# Altium PCB main_pcb.PcbDoc (part 2 of 2)
Units mil, origin at the board's own origin, x right, y up, seen from the top; angles counter-clockwise.
Board outline 4412.04 x 5197.88 mil, 4 copper layers (Top Layer, Mid-Layer Top, Mid-Layer Bottom, Bottom Layer); 125 components, 93 nets, 440 pads, 146 vias.
Unrouted connection lines stored in the file: 4.
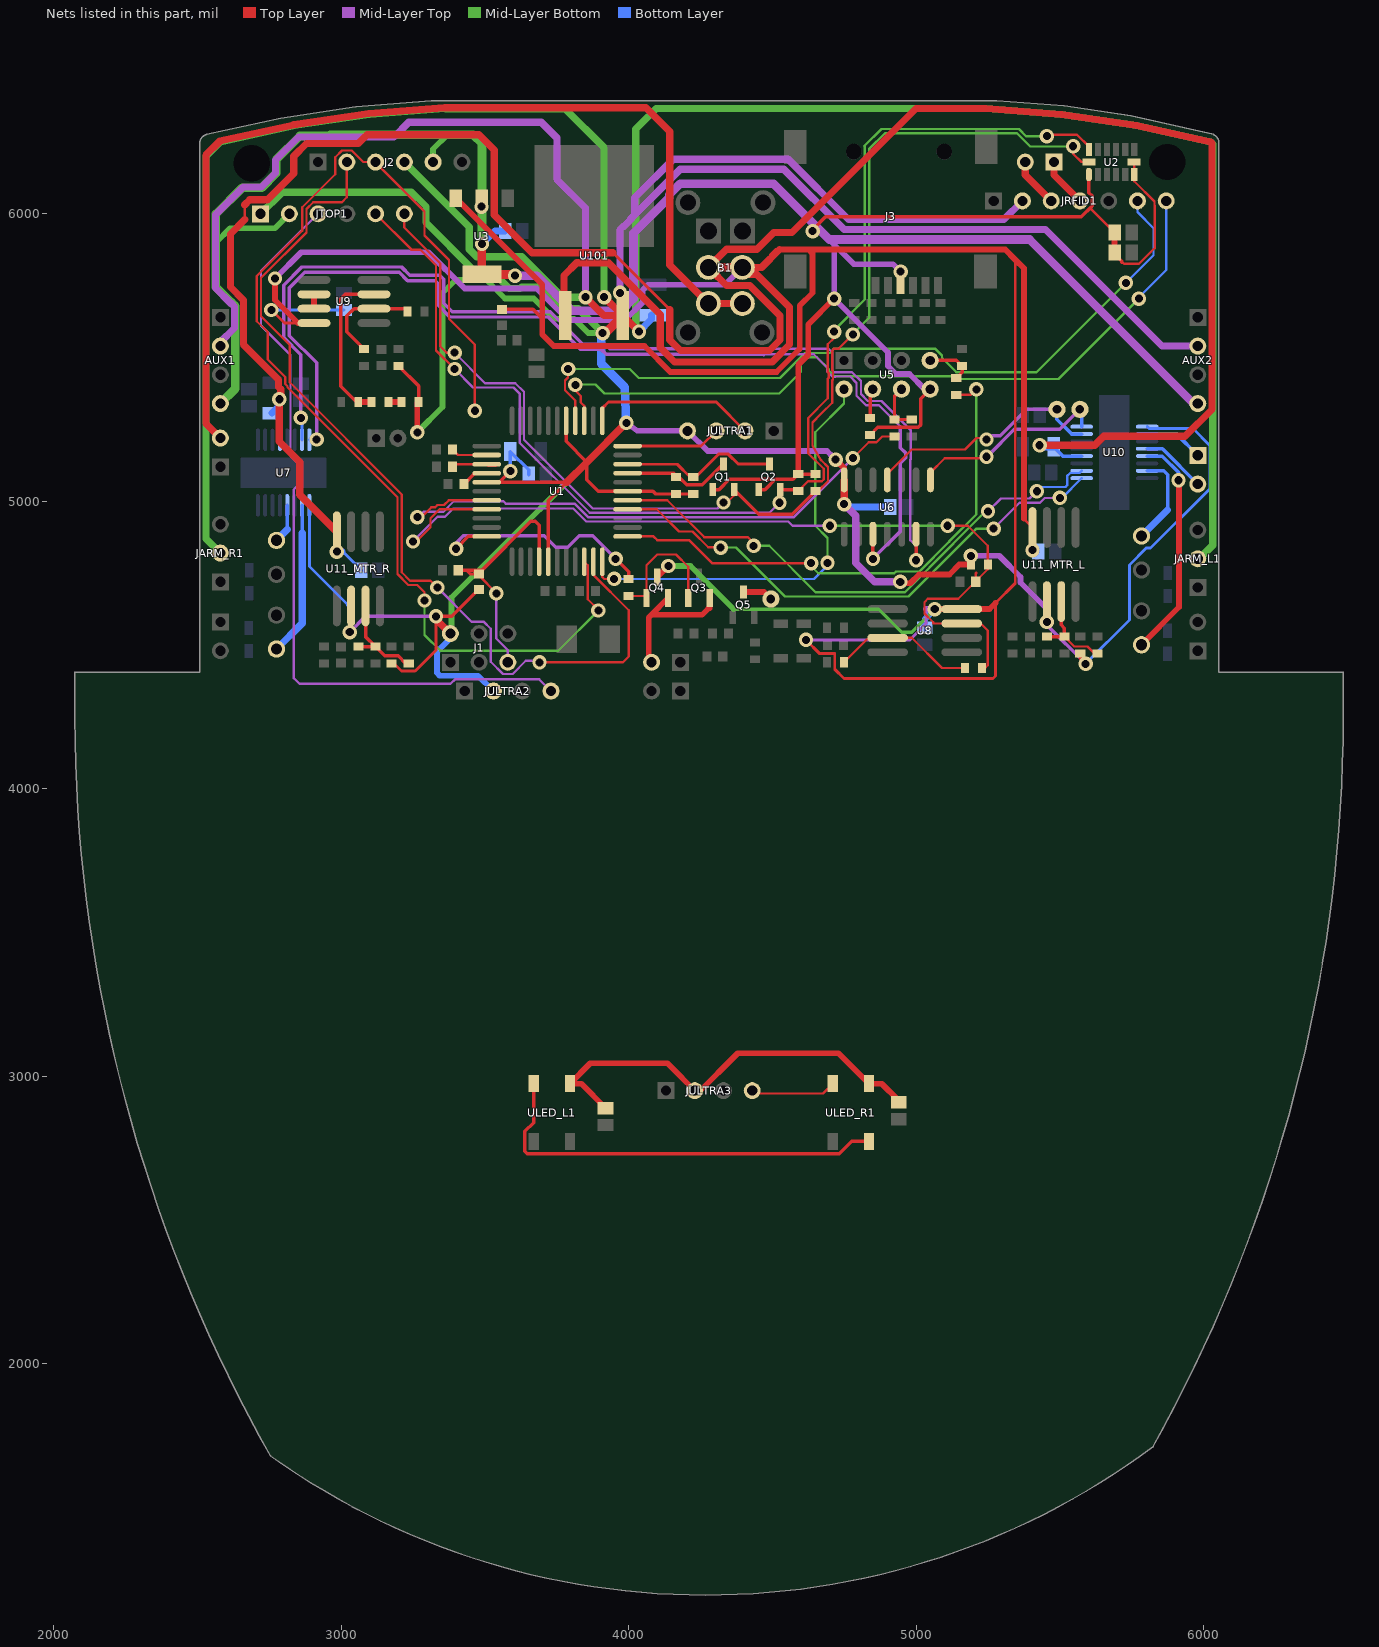
[diagram p4: the nets of this part, all layers, seen from the top]

## Via types
v1: diameter 50, hole 28, Top Layer to Bottom Layer, 138 vias
v2: diameter 25.98, hole 12.99, Top Layer to Bottom Layer, tented top, 8 vias

## Nets (pads, with @x,y where several pads share a name; then routed paths per layer and width w, separated by ;. In a path a pad name is that pad's centre, name@x,y a point inside that pad or via, vN(x,y) a via of type N, cw(c..) or ccw(c..) an arc to the next point about the centre after c; other vN are vias at no path point) (continued)
NetJANTENNA_2: JANTENNA.2 Q3.E Q4.E | length 512
  Top Layer w20: JANTENNA.2@4080,4440 4080,4450 4070,4460 4070,4596.18 4076.91,4603.09 4078.82,4605 ; Q4.E@4137.4,4663.58 4078.82,4605 ; 4157.4,4605 4160,4605 ; Q3.E@4282.4,4663.58 4282.4,4627.6 ; 4078.82,4605 4160,4605 ; 4160,4605 4255,4605 4277.6,4627.6 ; 4277.6,4627.6 4282.4,4627.6 ; 4277.6,4627.6 4282.4,4627.6
NetJANTENNA_MOD_1: JANTENNA_MOD.1 JRFID1.4 | length 172.3
  Top Layer w25: JANTENNA_MOD.1@5480,6180 5480,6135 JRFID1.4@5570,6045
NetJANTENNA_MOD_2: JANTENNA_MOD.2 JRFID1.3 | length 172.3
  Top Layer w25: JANTENNA_MOD.2@5380,6180 5380,6135 JRFID1.3@5470,6045
NetJSPK1_1: JSPK1.1 U10.2 | length 206.5
  Bottom Layer w12: U10.2@5804.17,5233.98 5906.02,5233.98 JSPK1.1@5980,5160
NetJSPK1_2: JSPK1.2 U10.4 | length 226.7
  Bottom Layer w12: U10.4@5804.17,5182.8 5857.2,5182.8 JSPK1.2@5980,5060
NetL1_MTR_L_1: L1_MTR_L.1 U10.7 | length 327.3
  Bottom Layer w12: U10.7@5804.17,5106.02 5861.02,5106.02 5875,5092.05 5875,4969.99
  Bottom Layer w25: L1_MTR_L.1@5784.06,4879.06 5875,4969.99
NetL1_MTR_R_1: L1_MTR_R.1 U7.2 | length 537.6
  Bottom Layer w12: U7.2@2863.98,4985.83 2865,4984.8 2865,4890
  Bottom Layer w25: L1_MTR_R.1@2775,4485.94 2865,4575.94 2865,4890
NetL2_MTR_L_2: L2_MTR_L.2 U10.5 | length 798
  Top Layer w20: L2_MTR_L.2@5784.06,4500.94 5915,4631.88 5915,5071.26 v1(5913,5073.26) v1@5905,5081.26
  Bottom Layer w12: U10.5@5804.17,5157.2 5855.93,5157.2 5913,5100.13 v1(5913,5073.26)
NetL2_MTR_R_2: L2_MTR_R.2 U7.4 | length 137.4
  Bottom Layer w12: 2812.8,4901.85 U7.4@2812.8,4985.83
  Bottom Layer w25: L2_MTR_R.2@2775,4864.06 2812.8,4901.85
NetQ3_B: Q3.B Q4.B R22.1 | length 480.3
  Top Layer w8: R22.1@4000,4670.47 Q4.B@4069.49,4670.47 ; Q4.B@4069.53,4670.51 Q4.B@4069.49,4670.47 ; Q3.B@4207.6,4663.58 4207.6,4772.4 4165,4815 4100,4815 4062.6,4777.6 Q4.B@4062.6,4663.58 Q4.B@4069.49,4670.47
NetR1_1: R1.1 U1.37 | length 94.8
  Top Layer w12: R1.1@3427.56,5060 3465.56,5098 U1.37@3506.6,5098
NetR2_1: R2.1 U1.36 | length 156.1
  Top Layer w8: R2.1@3387.56,5120 3396.56,5129 U1.36@3506.6,5129 3512.65,5122.95 U1.36@3537.42,5122.95
NetR3_1: R3.1 U1.35 | length 164.8
  Top Layer w8: R3.1@3387.56,5180 3406.56,5161 U1.35@3506.6,5161 U1.35@3544.47,5161
NetR17_1: R17.1 R19.1 U5.RXD | length 168.2
  Top Layer w12: U5.RXD@5049.12,5490.06 5140.41,5490.06 R19.1@5160,5470.47 5160,5449.53 R17.1@5140,5429.53
NetR18_2: R18.2 U5.CH_PD | length 119.7
  Top Layer w12: R18.2@4840,5289.53 4840,5380.94 U5.CH_PD@4849.12,5390.06 U5.CH_PD@4860,5379.18
NetR20_1: R20.1 R21.1 U5.RST | length 175.5
  Top Layer w12: U5.RST@4949.12,5390.06 4925,5365.95 R20.1@4925,5284.53 R21.1@4985,5284.53
NetR25_1: R25.1 R26.1 U8.3 | length 499.2
  Top Layer w8: R26.1@4749.53,4440 4829.53,4520 4896.06,4520 U8.3@4901.06,4525 4985,4525 5090,4420 R25.1@5170,4420
NetR28_1: R28.1 R30.2 U9.2 | length 365.3
  Top Layer w12: R30.2@3080,5529.53 3020,5589.53 3020,5645 3045,5670 U9.2@3114.33,5670 3220.47,5670 R28.1@3230.47,5660
NetR31_2: R31.2 R32.1 U9.3 | length 555.8
  Top Layer w12: R31.2@3059.53,5345 3054,5345 2999,5400 2999,5705 3014,5720 U9.3@3114.33,5720
  Top Layer w20: R31.2@3059.53,5345 R32.1@3105.47,5345
NetR32_2: R32.2 R33.1 | length 45.9
  Top Layer w20: R32.2@3164.53,5345 R33.1@3210.47,5345
NetR35_MTR_L_2: R35_MTR_L.2 R36_MTR_L.2 R99_MTR_L.1 U11_MTR_L.3 | length 325.5
  Top Layer w8: R36_MTR_L.2@5515.94,4529.53 5550.22,4495.25 5596.04,4495.25 R99_MTR_L.1@5620.82,4470.47
  Top Layer w12: R35_MTR_L.2@5455.94,4529.53 R36_MTR_L.2@5515.94,4529.53 5515.94,4559.06 5505,4570 U11_MTR_L.3@5505,4651.06 ; R99_MTR_L.1@5620.82,4470.47 R99_MTR_L.1@5630.94,4470.47
NetR35_MTR_R_2: R35_MTR_R.2 R36_MTR_R.2 R99_MTR_R.1 U11_MTR_R.3 | length 355.5
  Top Layer w12: R35_MTR_R.2@3060,4494.53 R36_MTR_R.2@3120,4494.53 ; U11_MTR_R.3@3085,4636.06 3085,4529.53 R36_MTR_R.2@3120,4494.53 ; R99_MTR_R.1@3235,4435.47 3224.88,4435.47 3198.1,4462.25 3152.28,4462.25 R36_MTR_R.2@3120,4494.53
NetU6_3: U6.3 U7.16 | length 3680.5
  Top Layer w12: v1(4850,4800) U6.3@4850,4885.51
  Mid-Layer Top w8: 4468.37,5511.63 4644.29,5511.63 4693.12,5462.79 4693.12,5461.72 4691.46,5460.06 4691.46,5450.95 4710,5432.41 4719.12,5432.41 4720.78,5434.06 4770.94,5434.06 4793.12,5411.88 4793.12,5366.87 4825.92,5334.06 4870.94,5334.06 4945,5260
  Mid-Layer Top w12: v1(2915,5215) 2915,5481.87 2820.31,5576.57 2820.31,5742.08 2874.24,5796.02 3202.37,5796.02 3230.89,5767.5 3327.5,5767.5 3338,5757 3338,5681.39 3378.39,5641 3435,5641 ; 3444,5641 3435,5641 ; 4469.55,5510.45 4468.37,5511.63 3922.11,5511.63 3905.74,5528 3833.35,5528 3720.35,5641 3435,5641 ; v1(4850,4800) 4945,4895 4945,5133.13 4964,5152.13 4964,5167.87 4945,5186.87 4945,5260
  Bottom Layer w10: U7.16@2889.57,5215 U7.16@2889.57,5214.17 U7.16@2889.57,5215 ; U7.16@2889.57,5215 v1(2915,5215) U7.16@2889.57,5215
NetU6_6: U6.6 U7.15 | length 3670.2
  Top Layer w12: v1(5000,4795) U6.6@5000,4885.51
  Mid-Layer Top w8: 4487.15,5530.63 4695.59,5530.63 4708.12,5518.1 4708.12,5455.51 4714.56,5449.06 4777.15,5449.06 4808.12,5418.1 4808.12,5373.08 4832.14,5349.06 4879.98,5349.06 4981,5248.04 4981,5145.09 4980,5144.09 4980,4865 5000,4845 v1(5000,4795)
  Mid-Layer Top w12: v1(2860,5290) 2860,5510 2800,5570 2800,5751.26 2863.76,5815.02 3210.24,5815.02 3238.76,5786.5 3343.5,5786.5 3357,5773 3357,5689.26 3386.26,5660 3728.22,5660 3841.22,5547 3918,5547 3934.37,5530.63 4487.15,5530.63
  Bottom Layer w12: v1(2860,5290) 2863.98,5286.02 U7.15@2863.98,5214.17
NetU6_8: pad.0@5570,5320 U6.8 U10.16 | length 750.5
  Top Layer w8: U6.8@5050,5100 5100,5150 v1@5237,5150 ; v1@5237,5150 v1@5238.5,5148.5 ; v1@5237,5150 v1@5238.5,5148.5 ; v1@5238.5,5148.5 5246,5141 v1@5238.5,5148.5
  Top Layer w12: U6.8@5045,5079.49 U6.8@5050,5074.49 U6.8@5050,5100 ; v1(5245,5155) 5250,5155 v1@5255,5150 ; v1@5252.5,5147.5 5246,5141 v1@5252.5,5147.5 ; v1@5252.5,5147.5 v1@5255,5150 ; v1@5252.5,5147.5 v1@5255,5150
  Mid-Layer Top w12: v1@5251.87,5160 5341.87,5250 5500,5250 pad.0@5570,5320
  Bottom Layer w12: pad.0@5570,5320 5575.83,5314.17 U10.16@5575.83,5259.57
NetU6_11: pad.0@5490,5320 U6.11 U10.15 | length 911.4
  Top Layer w8: U6.11@4900,5095 4985,5180 5170,5180 5210,5220 v1@5235,5220 ; v1@5235,5220 v1@5242.5,5212.5 ; v1@5235,5220 v1@5242.5,5212.5 ; v1@5242.5,5212.5 5245,5210 v1@5242.5,5212.5
  Top Layer w12: U6.11@4900,5074.49 U6.11@4900,5095
  Mid-Layer Top w12: pad.0@5490,5320 5385,5320 5292.5,5227.5 v1@5262.5,5227.5 ; v1@5247.5,5212.5 5245,5210 v1@5247.5,5212.5 ; v1@5247.5,5212.5 v1@5262.5,5227.5 ; v1@5247.5,5212.5 v1@5262.5,5227.5
  Bottom Layer w10: v1@5232,5228 v1(5245,5215)
  Bottom Layer w12: pad.0@5490,5320 5490,5284.79 5540.81,5233.98 U10.15@5575.83,5233.98
NetU9_6: U9.6 U9.7 | length 50
  Top Layer w20: U9.7@2905.67,5670 U9.6@2905.67,5720
NetULED_L1_2: ULED_L1.2 ULED_R1.4 | length 1465.9
  Top Layer w12: ULED_L1.2@3670.08,2974.17 3670.08,2839.01 3639.36,2808.3 3639.36,2738.47 3646.98,2730.86 4733.18,2730.86 4775.71,2773.39 ULED_R1.4@4836.06,2773.39
RESET: C3.2 J1.5 R8.2 U1.4 | length 910.5
  Top Layer w8: R8.2@3480,4747.56 3480,4741.46 3540,4681.46 v1(3540,4680)
  Top Layer w10: C3.2@3407.56,4760 3437,4760 3449.44,4747.56 R8.2@3480,4747.56
  Top Layer w12: C3.2@3407.56,4760 3467.56,4760 3490,4760 3660,4930 3675,4930 3688.6,4916.4 U1.4@3688.6,4790
  Mid-Layer Top w8: v1(3540,4680) 3540,4565 3539.47,4564.47 3539.47,4523.21 3580,4482.69 J1.5@3580,4440
RFID_PULSE: R22.2 U1.44 | length 865.2
  Top Layer w12: v1(3400,4835) 3443,4878 U1.44@3506.6,4878 ; v1(3955,4800) 4000,4755 R22.2@4000,4729.53
  Mid-Layer Top w12: v1(3400,4835) 3400,4855 3425,4880 3706.26,4880 3746.31,4839.95 3788.69,4839.95 3828.74,4880 3875,4880 v1(3955,4800)
RFID_READ: C103.2 R23.2 R25.2 U1.41 U8.7 | length 3318.3
  Top Layer w8: v1(3250,4860) 3260,4860 v1@3260.46,4859.54 ; v1@3260,4859.09 v1@3260.46,4859.54 ; U1.41@3506.6,4972 3342,4972 3311,4941 3311,4910.09 v1@3262.96,4862.04 ; v1@5105,4910 v1(5110,4915) 5180,4915 5249.53,4845.47 R23.2@5249.53,4780 5249.53,4763.94 5146.59,4661 5041,4661 5029,4649 5029,4610.09 5060,4579.09 5060,4575 U8.7@5158.94,4575 ; U8.7@5220,4575 U8.7@5158.94,4575 ; R25.2@5229.53,4420 5239.53,4420 5249.53,4430 5249.53,4550.47 5225,4575 U8.7@5158.94,4575 ; v1@3260.46,4859.54 v1@3262.96,4862.04 ; v1@3260.46,4859.54 3262.96,4857.04 3262.96,4860 v1@3262.96,4862.04 ; C103.2@5206.58,4720.98 5207.56,4721.97 C103.2@5206.58,4720.98
  Top Layer w10: C103.2@5207.56,4720 5207.56,4721.97 5207.56,4749 ; 5207.56,4749 5209.53,4750.97 5207.56,4749
  Mid-Layer Top w8: v1(3250,4860) 3250,4860.91 3335.09,4946 3361,4946 3390,4975 3807.57,4975 3852.57,4930 4555,4930 4570,4915 v1(4700,4915)
  Mid-Layer Bottom w8: v1(4700,4915) v1(5110,4915)
RST_WIFI: R20.2 U1.40 | length 2252.4
  Top Layer w8: v1(3265,4945) 3265,4935 3270,4930 v1@3270,4935 ; U1.40@3506.6,5004 3374.91,5004 3357.91,4987 3335.79,4987 3327.79,4979 3314,4979 ; v1@4790,5160 4835.69,5205.69 4862.27,5205.69 4882.05,5225.47 R20.2@4925,5225.47 ; v1@3270,4935 v1@3272.5,4937.5 ; v1@3270,4935 v1@3272.5,4937.5 ; v1@3272.5,4937.5 3314,4979 ; v1@3272.5,4937.5 3314,4979
  Top Layer w10: v1(4780,5150) v1@4790,5160
  Mid-Layer Top w8: v1(3265,4945) 3265,4935 v1@3275,4925 ; v1@4770,5140 4575,4945 3858.79,4945 3811.83,4991.95 3573.05,4991.95 3565,5000 3392.12,5000 3356.12,4964 3286.96,4964 v1@3275,4952.04 ; v1@3275,4925 v1@3275,4945 ; v1@3275,4925 v1@3275,4945 ; v1@3275,4945 v1@3275,4952.04 ; v1@3275,4945 v1@3275,4952.04
  Mid-Layer Top w10: v1(4780,5150) v1@4780,5140 ; v1@4780,5140 4770,5140 v1@4780,5140
RXD_FTDI: J2.3 U1.9 | length 4086.8
  Top Layer w8: v1(3290,4655) 3290,4684 3265,4709 3233.88,4709 3196,4746.88 3196,5014 2813.5,5396.5 2813.5,5400.29 2806,5407.79 2806,5432.23 2744.53,5493.7 2744.53,5588.45 2706.47,5626.51 2706.47,5783.6 2864.47,5941.6 2864.47,6023 2979.47,6138 2979.47,6196.79 3003.21,6220.53 3036.79,6220.53 3077.31,6180 J2.3@3120,6180 3120,6178.53 3290,6008.53 3290,5924.76 3375,5839.76 3375,5635 3465,5545 v1(3465,5315) ; U1.9@3845.6,4790 3857.86,4777.74 3857.86,4659.24 3895,4622.09 v1(3895,4620)
  Mid-Layer Top w8: v1@3465,5314.09 v1(3465,5315)
  Mid-Layer Bottom w8: v1(3290,4655) 3290,4535.39 3345.39,4480 3345.92,4480.53 3755.53,4480.53 v1(3895,4620)
RXD_RFID: JRFID1.7 U1.25 | length 2759.1
  Top Layer w8: v1(3815,5405) v1@3805,5395 ; U1.25@3845.6,5280 3845.6,5331.89 3834,5343.49 3834,5366 ; v1@3805,5395 3834,5366 ; v1@3805,5395 3834,5366
  Mid-Layer Bottom w8: v1(3815,5405) 3816,5406 3884.91,5406 3915.91,5375 4523.79,5375 4599,5450.21 4599,5479.91 4620.09,5501 4654.91,5501 4696,5459.91 4696,5454.91 4715.91,5435 5133.09,5435 5142.57,5425.53 5495.53,5425.53 v1(5775,5705)
  Bottom Layer w8: v1(5775,5705) 5775,5710 5870,5805 JRFID1.7@5870,6045
RXD_WIFI: U1.11 U5.TXD | length 1532.9
  Top Layer w8: U1.11@3908.6,4790 3908.6,4736.4 3915,4730 v1(3950,4730) ; v1(4692,4786) v1@4693,4785
  Mid-Layer Bottom w8: v1(4692,4786) 4692,4872.09 4649,4915.09 4649,5239.91 4749.12,5340.03 U5.TXD@4749.12,5390.06
  Bottom Layer w8: v1(3950,4730) 4645,4730 4692,4777 v1(4692,4786)
SCL_3V: JTOP1.6 Q1.2 R4.2 U2.14 | length 4443.1
  Top Layer w8: JTOP1.6@3220,6000 3220,5952.34 3345,5827.34 3345,5538.79 3366.79,5517 v1(3395,5517) ; v1(4330,4996) 4336,4990 4367.4,5021.4 Q1.2@4367.4,5040.71 ; R4.2@4650,5035.47 4659.21,5035.47 4693.72,5069.98 4693.72,5119.08 4670.08,5142.71 4640.08,5193.31 4640.08,5274.49 4670.08,5305.08 4708.12,5343.12 4708.12,5420.99 4711,5423.88 4711,5452.63 4708.12,5455.51 4708.12,5524.62 4714.56,5531.06 4731.06,5531.06 v1(4780,5580) ; v1(5546.26,6235) 5546.26,6208.74 5575,6180 U2.14@5601.26,6180
  Top Layer w12: Q1.2@4367.4,5040.71 4453.11,4955 4569.53,4955 R4.2@4650,5035.47
  Mid-Layer Top w8: v1@3395,5505 v1(3395,5517) 3501,5411 3606.12,5411 3636,5381.12 3636,5214 3875,4975 4309,4975 v1(4330,4996)
  Mid-Layer Bottom w8: v1(4780,5580) 4780,5582.1 4836.69,5638.79 4836.69,6225 4891.69,6280 5351.38,6280 5397.38,6234 5545.26,6234 v1(5546.26,6235)
SCL_5V: Q1.3 R7.2 U1.19 | length 440.8
  Top Layer w10: R7.2@4151.53,5098 R7.2@4158,5098 ; R7.2@4165,5084.53 R7.2@4158,5084.53 ; R7.2@4158,5084.53 R7.2@4158,5098 ; R7.2@4158,5084.53 R7.2@4158,5098
  Top Layer w12: U1.19@4036.3,5098 U1.19@3996.6,5098 R7.2@4151.53,5098 ; R7.2@4165,5084.53 4175.12,5084.53 4201.9,5057.75 4256.8,5057.75 4328.35,5129.29 Q1.3@4330,5129.29
SDA_3V: JTOP1.5 Q2.2 R5.2 U2.13 | length 4640.9
  Top Layer w8: JTOP1.5@3120,6000 3244.5,5875.5 3275.62,5875.5 3330,5821.12 3330,5525 v1(3395,5460) ; v1(4525,4995) 4527.4,4997.4 Q2.2@4527.4,5040.71 ; R5.2@4590,5035.47 4624.28,5069.75 4672.27,5069.75 4678.72,5076.19 4678.72,5112.86 4625,5166.58 4625,5290 4693.12,5358.12 4693.12,5427.21 4696,5430.09 4696,5446.41 4693.12,5449.29 4693.12,5546.06 4715,5567.94 v1(4715,5590) ; v1(5455,6270) v1@5455,6285 ; v1@5460,6275 5560,6275 U2.13@5601.26,6233.74
  Top Layer w10: U2.13@5601.26,6223.31 U2.13@5601.26,6233.74
  Top Layer w12: Q2.2@4527.4,5040.71 4584.76,5040.71 R5.2@4590,5035.47
  Mid-Layer Top w8: v1(3395,5460) 3459,5396 3599.91,5396 3621,5374.91 3621,5204 3865,4960 4490,4960 v1(4525,4995)
  Mid-Layer Bottom w8: v1(4715,5590) v1@4710,5590 ; v1@5455,6285 v1(5455,6270) 5382.59,6270 5357.59,6295 4879.3,6295 4820,6235.7 4821.69,6234.01 4821.69,5701.69 ; v1@4710,5590 v1@4712.5,5592.5 ; v1@4710,5590 v1@4712.5,5592.5 ; v1@4712.5,5592.5 4821.69,5701.69 ; v1@4712.5,5592.5 4821.69,5701.69
SDA_5V: Q2.3 R6.2 U1.20 | length 559.1
  Top Layer w10: U1.20@3996.6,5129 4168.99,5129 4213.47,5084.53 R6.2@4225,5084.53 4233.82,5084.53 4313.22,5163.93 4346.78,5163.93 4381.42,5129.29 Q2.3@4490,5129.29
SPK_N: U1.16 U10.10 | length 1982.5
  Top Layer w8: U1.16@3996.6,5004 4134.64,5004 4263.64,4875 4415,4875 ; v1(4435,4845) v1@4440,4850 ; 4415,4875 v1@4440,4850 ; 4415,4875 v1@4440,4850
  Mid-Layer Top w8: v1(5250,4965) 5295,5010 5395,5010 v1(5420,5035)
  Mid-Layer Bottom w8: v1(4435,4845) 4489.09,4845 4650.09,4684 4961.12,4684 5130,4852.88 5130,4853.79 5241.21,4965 v1(5250,4965)
  Bottom Layer w8: v1(5420,5035) v1@5415,5035 ; U10.10@5575.83,5106.02 5568.13,5098.32 5535.94,5098.32 5525.46,5087.84 5525.46,5055.65 5519.8,5050 v1@5430,5050 ; v1@5415,5035 v1@5417.5,5037.5 ; v1@5415,5035 v1@5417.5,5037.5 ; v1@5417.5,5037.5 v1@5430,5050 ; v1@5417.5,5037.5 v1@5430,5050
SPK_P: U1.15 U10.9 | length 1893.3
  Top Layer w8: U1.15@3996.6,4972 4098,4972 4175,4895 4222.43,4895 4277.43,4840 4319,4840 v1(4320,4839)
  Mid-Layer Top w8: v1(5270,4905) 5360,4995 5430.91,4995 5447.71,5011.8 v1(5500.39,5011.8) v1@5493.59,5005
  Mid-Layer Bottom w8: v1@4326,4845 v1(4320,4839) 4373.98,4839 4543.98,4669 4974,4669 5210,4905 v1(5270,4905)
  Bottom Layer w8: v1(5500.39,5011.8) 5507.2,5011.8 U10.9@5575.83,5080.43
TOP_LEDS: JTOP1.3 JULTRA2.4 JULTRA3.4 ULED_R1.2 | length 2965.4
  Top Layer w8: JULTRA3.4@4440,2940 4675.9,2940 ULED_R1.2@4710.08,2974.17
  Mid-Layer Top w8: JTOP1.3@2920,6000 2721.47,5801.47 2721.47,5611.51 2824,5508.98 2824,5157.17 2847.61,5133.56 2847.61,5053.83 2835,5041.21 2835,4385 2855,4365 3380.39,4365 3395.92,4380.53 3689.47,4380.53 JULTRA2.4@3730,4340
TXD_FTDI: J2.2 U1.10 | length 3224.6
  Top Layer w8: J2.2@3020,6180 3020,6057.31 3003.21,6040.53 2903.21,6040.53 2879.47,6016.79 2879.47,5935.38 2721.47,5777.38 2721.47,5643.53 2821,5544 2821,5414 3211,5024 3211,4753.09 3240.09,4724 3311,4724 v1(3335,4700) ; v1(3690,4440) 3690.27,4440.27 3980.18,4440.27 4000.24,4460.33 4000.24,4621.34 3877.6,4743.98 U1.10@3877.6,4790
  Mid-Layer Top w8: v1(3335,4700) 3454.47,4580.53 3496.79,4580.53 3520.53,4556.79 3520.53,4442.16 3563.21,4399.47 3596.79,4399.47 3642.31,4445 3685,4445 v1(3690,4440)
TXD_RFID: JRFID1.6 U1.26 | length 2731.8
  Top Layer w8: v1(3789.6,5460.21) 3789.6,5430.51 3779,5419.91 3779,5386 3814.6,5350.4 U1.26@3814.6,5280
  Mid-Layer Bottom w8: v1@3804.81,5445 v1(3789.6,5460.21) 4003.88,5460.21 4035.09,5429 4526.88,5429 4588.94,5491.06 4613.88,5516 4699.5,5516 4714.56,5531.06 5066.1,5531.06 5090.12,5507.05 5090.12,5499.19 5140.24,5449.06 5419.06,5449.06 v1(5730,5760)
  Bottom Layer w8: v1(5730,5760) 5826,5856 5826,5949.91 5770,6005.91 JRFID1.6@5770,6045
TXD_WIFI: R17.2 U1.12 | length 1846.5
  Top Layer w8: U1.12@3996.6,4878 4087,4878 4100,4865 4210,4865 4290,4785 v1@4625,4785 ; R17.2@5140,5370.47 5190.47,5370.47 v1(5209.53,5389.53)
  Mid-Layer Bottom w8: v1@4635,4775 4660,4750 4924.09,4750 4930.09,4756 5011.91,4756 5115,4859.09 ; 5115,4860 5209.53,4954.53 5209.53,5139.56 ; 5209,5140.09 5209,5169.91 ; 5209,5195.09 v1@5209,5389 ; 5209.53,5170.44 5209.53,5194.56
  other v1: 4635,4785
ULTRA_ECHO: JULTRA1.2 U1.23 | length 612.8
  Top Layer w10: U1.23@3908.6,5302.5 U1.23@3908.6,5280 3908.6,5323.6 3930,5345 4305,5345 JULTRA1.2@4405,5245
ULTRA_TRIG: JULTRA1.3 U1.22 | length 330.4
  Top Layer w10: U1.22@3996.6,5192 4252,5192 JULTRA1.3@4305,5245
V3: AUX1.4 AUX2.4 C7.1 C8.1 C9.1 J2.5 J3.4 JTOP1.2 Q1.1 Q2.1 R4.1 R5.1 R18.1 U2.1 U2.6 U2.7 U3.2 U5.VCC | length 10299.4
  Top Layer w8: 5610.53,6025.38 5610.53,6014.95 C8.1@5690.47,5935 ; C7.1@5690.47,5859.29 5723.32,5826.44 5775.74,5826.44 5830,5880.7 5830,6027.69 5829.47,6028.21 5829.47,6042.84 5758.74,6113.57 U2.6@5758.74,6136.69 U2.7@5758.74,6180
  Top Layer w12: Q1.1@4292.6,5040.71 4314.57,5040.71 4350.21,5076.35 4510.21,5076.35 ; Q2.1@4452.6,5040.71 4474.57,5040.71 4510.21,5076.35 ; v1(4640,5940) 4640,5945 4685,5990 5575.14,5990 5610.53,6025.38 5612.53,6027.38 5612.53,6062.62 5601.26,6073.88 U2.1@5601.26,6136.69 ; R4.1@4650,5094.53 R5.1@4590,5094.53 4571.82,5076.35 4510.21,5076.35 ; R18.1@4840,5230.47 4867.28,5257.75 5008.1,5257.75 5015.72,5265.36 5015.72,5356.66 U5.VCC@5049.12,5390.06 ; C7.1@5690.47,5865 5690.47,5859.29 5714.87,5834.88 5714.87,5832.06
  Top Layer w20: R5.1@4590,5094.53 4590,5475 4625,5510 4625,5615 v1(4715,5705) ; J3.4@4946.22,5751.3 v1(4946.22,5798.78) ; C7.1@5690.47,5865 C8.1@5690.47,5935
  Top Layer w30: v1(3488.44,6024.68) 3489.4,6025.64 U3.2@3489.4,6054.87 ; v1(3490,5895) 3489.4,5894.4 U3.2@3489.4,5789.13 v1@3600.87,5789.13
  Mid-Layer Top w12: v1@4635,5945 v1(4640,5940)
  Mid-Layer Top w20: 4697.9,5910.5 4715,5893.4 ; v1(4946.22,5798.78) 4920,5825 4783.4,5825 4715,5893.4 ; U5.VCC@5049.12,5390.06 5029.94,5390.06 4976.94,5443.06 4929.65,5443.06 4902.12,5470.6 4902.12,5517.88 v1(4715,5705) 4715,5893.4
  Mid-Layer Top w30: v1(3605,5785) 3681,5785 3803,5663 3974.47,5663 4017,5705.53 4017,5932 4140.82,6055.82 ; 4140.82,6065.94 4179.08,6104.2 4504.2,6104.2 4654.2,5954.2 4697.9,5910.5 5394.5,5910.5 5965,5340 AUX2.4@5980,5340
  Mid-Layer Bottom w20: 2564.5,5900 2614.5,5950 2770,5950 JTOP1.2@2820,6000 ; J2.5@3320,6180 3320,6225 3370,6275
  Mid-Layer Bottom w30: AUX1.4@2580,5340 2631.53,5391.53 2631.53,5678.64 2618.64,5691.53 2617.97,5691.53 2564.5,5745 2564.5,5900 2564.5,5999.5 2656.01,6091.01 2724.2,6091.01 2773.99,6140.8 2773.99,6187.86 2856.89,6270.76 2957.71,6270.76 2961.95,6275 3370,6275 3460,6275 3490,6245 v1(3490,5895) ; v1@3488.44,6016.56 v1(3488.44,6024.68)
  Bottom Layer w25: v1(3490,5895) 3535,5940 C9.1@3570.47,5940
V5: AUX1.2 AUX2.2 C4.2 C5.2 C10.1 C11.1 C12.1 C16.1 J1.2 J2.4 JARM_L1.2 JARM_R1.2 JRFID1.2 JTOP1.1 JULTRA1.4 JULTRA2.2 JULTRA3.2 R6.1 R7.1 R8.1 R23.1 R29.1 R33.2 R34_MTR_L.1 R34_MTR_R.1 U1.5 U1.17 U1.27 U1.38 U6.14 U7.1 U10.1 U11_MTR_L.2 U11_MTR_R.2 U101.5V ULED_L1.1 ULED_R1.1 | length 28765.3
  Top Layer w8: v1(3030,4545) U11_MTR_R.2@3030,4631.06
  Top Layer w10: U11_MTR_R.2@3030,4631.06 3035,4631.06 U11_MTR_R.2@3035,4636.06 ; R34_MTR_R.1@3175,4435.47 3183.78,4435.47 3209.56,4409.69 3257.69,4409.69 3330,4482.01 v1@3330,4590
  Top Layer w12: R29.1@3200,5470.47 3269.53,5400.94 R33.2@3269.53,5345 ; v1@3330,4590 v1(3330,4600) 3385,4600 3477.44,4692.44 R8.1@3480,4692.44 ; U1.38@3506.6,5066 U1.38@3550.09,5066 ; v1(3588.9,5104.8) U1.38@3550.09,5066 ; U1.5@3720.6,4790 3720.6,5001.5 3785.09,5066 U1.38@3550.09,5066 ; U1.27@3782.6,5280 3782.6,5208.3 3855,5135.9 3855,5075 3895,5035 U1.17@3996.6,5035 4085,5035 4094.53,5025.47 R7.1@4165,5025.47 ; R7.1@4174.17,5025.47 R6.1@4225,5025.47 ; v1@4945,4715 v1(4945,4720) ; v1(5455,4580) U11_MTR_L.2@5455,4651.06 ; R34_MTR_L.1@5570.94,4470.47 5570.94,4453.72 v1(5589.83,4434.83)
  Top Layer w20: v1(3265,5240) 3265,5340.47 R33.2@3269.53,5345 ; C11.1@3920,2890 3835.83,2974.17 ULED_L1.1@3796.06,2974.17 3866.89,3045 4135,3045 4240,2940 4380,3080 4730.24,3080 ULED_R1.1@4836.06,2974.17 4880.83,2974.17 C12.1@4935,2920 ; U6.14@4750,5074.49 4750,5115 v1(4720,5145) ; v1@4945,4715 4980,4715 5010.55,4745.55 5116.02,4745.55 5150.47,4780 R23.1@5189.56,4780 ; R23.1@5190.47,4780 v1(5190.47,4810.47) ; v1(4720,5145) 4710,5155 4710,5145 v1(4720,5145)
  Top Layer w25: v1@3330,4590 J1.2@3380,4540 ; 3785.09,5066 3855,5135.9 v1(3992.05,5272.95) ; v1(3850,5710) 3913.94,5646.06 U101.5V@3978.94,5646.06 ; v1(3915,5710) U101.5V@3978.94,5646.06 ; v1(3970,5725) 3980,5715 U101.5V@3980,5646.06 ; v1(4036.06,5590) U101.5V@3980,5646.06 ; v1(4750,4990) U6.14@4750,5074.49 ; U101.5V@3978.94,5646.06 U101.5V@3980,5646.06
  Top Layer w30: v1@3923.94,5590 U101.5V@3980,5646.06
  Mid-Layer Top w12: v1(3030,4545) 3085,4600 v1(3330,4600) ; v1(5455,4580) 5455,4569.66 v1(5589.83,4434.83) ; JARM_L1.2@5980,4777.44 JARM_L1.2@5980,4800
  Mid-Layer Top w20: v1(3992.05,5272.95) 4030,5245 JULTRA1.4@4205,5245 4275,5175 4690,5175 4710,5155 4710,5145 v1(4720,5145) ; v1(5190.47,4810.47) 5289.53,4810.47 5363,4737 5363,4717.6 5455,4625.6 v1(5455,4580)
  Mid-Layer Top w25: AUX1.2@2580,5540 2580,5553.37 2629.03,5602.4 2629.03,5677.6 2617.6,5689.03 2615.97,5689.03 2562.97,5742.03 2562.97,5996.48 2660,6093.51 2723.17,6093.51 2771.49,6141.83 2771.49,6187.54 2851.47,6267.51 3184.31,6267.51 3235.2,6318.41 3696.59,6318.41 3750.5,6264.5 3750.5,6119.5 3850,6020 v1(3850,5710) ; v1(3970,5725) 3970,5945 3980.5,5955.5 3983.43,5955.5 4009.5,5981.57 4009.5,5984.5 4021.64,5996.64 ; v1(4750,4990) 4790,4950 4790,4785 4855,4720 v1(4945,4720) ; JRFID1.2@5370,6045 5305,5980 4765,5980 4555,6190 4155,6190 4021.64,6056.64 4021.64,5996.64 ; AUX2.2@5980,5540 5855,5540 5450,5945 4750,5945 4540,6155 4180,6155 4021.64,5996.64
  Mid-Layer Bottom w20: v1(3265,5240) 3353,5328 3353,5724.4 3398.3,5769.7 3505.3,5769.7 3570,5705 3670,5705 3740,5635 3810,5635 3860,5585 v1(3910,5585) ; J1.2@3380,4540 3384.09,4544.09 3384.09,4665 v1(3992.05,5272.95)
  Mid-Layer Bottom w25: JARM_R1.2@2580,4820 2530,4870 2530,6200 2580,6250 2837.57,6306.96 3098.48,6345.81 3362.59,6366.42 3364.01,6365 3780,6365 3915,6230 v1(3915,5710) ; JTOP1.1@2720,6000 2795,6075 3245,6075 3295,6025 3295,5970 3460,5805 3520,5805 3584.5,5740.5 3623.43,5740.5 ; J2.4@3220,6180 3445.5,5954.5 3445.5,5876.57 3471.57,5850.5 3628.5,5850.5 3769,5710 v1(3850,5710) ; 3627.93,5745 3685,5745 3760,5670 3825,5670 v1(3910,5585) ; v1(4036.06,5590) 4025,5590 4025,6295 4096.42,6366.42 5242.41,6366.42 5506.52,6345.81 5767.43,6306.96 6025,6250 6031.85,6243.15 6031.85,4846.85 5985,4800 JARM_L1.2@5980,4800
  Bottom Layer w10: U7.1@2889.57,4985.83 2889.57,4773.11 3023.61,4639.06 ; v1(5589.83,4434.83) 5742.06,4587.06 5742.06,4778.34 5800.78,4837.06 5815.78,4837.06 6021.53,5042.8 6021.53,5194.5 5963.16,5252.87 5810.87,5252.87 U10.1@5804.17,5259.57
  Bottom Layer w12: 3023.61,4639.06 3030,4632.67 v1(3030,4545) ; v1(3588.9,5104.8) C4.2@3588.9,5172.95 3652.52,5109.33 C5.2@3652.52,5092.95
  Bottom Layer w20: J1.2@3380,4540 3380,4523.1 3333.47,4476.57 3333.47,4403.43 3343.43,4393.47 3476.53,4393.47 JULTRA2.2@3530,4340
  Bottom Layer w25: v1(4036.06,5590) 4080,5633.94 C10.1@4080,5646.85 ; v1(4750,4990) 4760,4980 C16.1@4910.47,4980
  Bottom Layer w30: v1@3905,5580 3905,5478.79 3987.05,5396.74 ; 3987.05,5392.95 v1(3992.05,5272.95)
VB: B1.3 B1.4 JBAT1.2 | length 3456.1
  Top Layer w25: JBAT1.2@2580,5220 2529.57,5270.43 2529.57,6204.57 2577.72,6252.72 2835.29,6309.68 3096.2,6348.54 3360.31,6369.14 4060.86,6369.14 4143.32,6286.68 4143.32,5822.35 4143.32,5821.98 B1.3@4277.49,5687.81 ; B1.3@4277.49,5688.18 B1.3@4277.49,5687.81 ; B1.4@4395.6,5687.81 B1.3@4277.49,5687.81
VBATT: B1.2 B1.5 C13.2 C17.1 C22.1 C24.2 C27_MTR_L.1 C27_MTR_R.1 pad.0@4495,4660 Q4.C Q5.3 R10.2 U3.3 U7.12 U8.8 U9.8 U10.12 U11_MTR_L.8 U11_MTR_R.8 U101.IN | length 23531.7
  Top Layer w10: 2665,5980 2665,6031.63 2665,6032 2681,6048 2681.37,6048 2709,6048 2710.03,6049.03 ; v1(2757.47,5665.47) 2802.94,5620 2850,5620 U9.8@2905.67,5620 ; 3520,6235 3532.94,6222.06 3533,6222 3533,5996 3664,5865 3945,5865 3945.25,5864.75 4143,5667 4143,5568 4143.32,5567.68 4186.87,5524.13 4187,5524 ; B1.5@4395.6,5813.8 B1.5@4395.6,5782 ; B1.5@4402.2,5807.2 B1.5@4402.2,5782 ; 4494,5844.58 4494,5858 4512,5876 5312,5876 5345,5843 5345,5840.58 5345,4715 5276,4646 5276,4392 5268,4384 4749,4384 4717,4416 4717,4470 4665,4470 v1(4617,4518) ; 5375,5137 5375,4938.94 U11_MTR_L.8@5405,4908.94 ; v1@5430,5192 v1(5430,5195) ; B1.5@4395.6,5782 B1.5@4402.2,5782 ; B1.5@4395.6,5782 B1.5@4402.2,5782
  Top Layer w12: R10.2@3560,5667.56 3667.44,5667.56 3700,5635 ; v1(5405,4830) U11_MTR_L.8@5405,4908.94
  Top Layer w20: v1(2770,5775) 2770,5700 ; U9.8@2905.67,5620 U9.8@2850,5620 ; v1(2985,4825) U11_MTR_R.8@2985,4893.94 ; U3.3@3398.85,6054.87 3700,5753.72 3700,5635 3700,5580 3740,5540 4055,5540 4145,5450 4515,5450 4595,5530 4595,5680 4640,5725 4640,5861.12 4625.54,5875.58 ; Q4.C@4100,4736.42 v1(4138.58,4775) ; Q5.3@4400,4684.29 4470.71,4684.29 pad.0@4495,4660 ; 4525,5875.58 4625.54,5875.58 ; v1(5065,4625) U8.8@5158.94,4625 ; U8.8@5215,4625 U8.8@5158.94,4625 ; 5276,4646 5255,4625 U8.8@5158.94,4625 ; 5375,4938.94 5375,5810.58 5345,5840.58 5310,5875.58 4625.54,5875.58 ; 2770,5700 U9.8@2850,5620 ; 2770,5700 U9.8@2850,5620
  Top Layer w25: 2665,5980 2615,5930 2615,5745 2660,5700 2660,5545 2782.5,5422.5 2782.5,5398.05 2790,5390.55 v1@2790,5365 ; 2665,6031.63 2681.37,6048 2682.4,6049.03 2710.03,6049.03 2744.03,6049.03 2835,6140 2835,6200 2880,6245 3060,6245 3090,6275 3480,6275 3532.94,6222.06 3532.94,5996.06 3664.25,5864.75 3945.25,5864.75 ; v1(2785,5355) 2785,5208.2 2856.11,5137.08 2856.11,5022.82 U11_MTR_R.8@2985,4893.94 ; U101.IN@3780,5646.06 3775,5651.06 3775,5785 3820,5830 3929.94,5830 4110,5649.94 4110,5535 4160,5485 4500,5485 4560,5545 ; 4143,5667 4143.32,5666.68 4143.32,5567.68 4143.32,5560.92 4180.11,5524.13 4186.87,5524.13 4489.84,5524.13 4526.63,5560.92 4526.63,5645.6 4421.61,5750.62 4340.67,5750.62 B1.2@4285.64,5805.64 ; B1.2@4277.49,5813.8 4340.67,5876.97 4446.98,5876.97 4505.01,5935 4568.71,5935 5000.13,6366.42 5242.41,6366.42 5506.52,6345.81 5767.43,6306.96 6025,6250 6029.03,6245.97 6029.03,5319.69 5935.45,5226.11 5652.92,5226.11 5621.81,5195 v1(5430,5195) ; B1.5@4395.6,5813.8 4463.22,5813.8 4525,5875.58 ; B1.5@4402.2,5807.2 4419.39,5790 4445,5790 ; 4445,5790 4560,5675 ; 4445,5790 4560,5675 ; 4560,5545 4560,5675 ; 4560,5545 4560,5675
  Top Layer w30: B1.2@4277.49,5813.8 B1.5@4395.6,5813.8 B1.5@4402.2,5807.2
  Mid-Layer Top w10: v1(4617,4518) 4978,4518 5034.4,4574.4 5034.4,4625
  Mid-Layer Top w20: v1(2770,5775) 2861.5,5866.5 3303.5,5866.5 3430,5740 3680.75,5740 3789.75,5631 3987.72,5631 4049,5692.28 4049,5735 4067.2,5753.2 4335,5753.2 B1.5@4395.6,5813.8 ; 5034.4,4625 v1(5065,4625)
  Mid-Layer Bottom w12: 4365,4625 4495,4625 4870,4625 4950,4545 4985,4545 v1(5065,4625)
  Mid-Layer Bottom w20: v1(4138.58,4775) 4215,4775 4365,4625
  Bottom Layer w10: v1(2757.47,5665.47) C22.1@3010,5665.47 ; v1@2995.24,4835.24 3005.47,4825 C27_MTR_R.1@3070.47,4760
  Bottom Layer w12: C13.2@2785,5316.85 C13.2@2787.2,5314.65 ; v1(5405,4830) 5410,4825 C27_MTR_L.1@5425.47,4825 ; C24.2@5478.15,5190 5510.94,5157.2 U10.12@5575.83,5157.2 ; C13.2@2787.2,5306.85 U7.12@2787.2,5214.17 C13.2@2787.2,5306.85 ; C13.2@2787.2,5306.85 C13.2@2787.2,5314.65 ; C13.2@2787.2,5306.85 C13.2@2787.2,5314.65
  Bottom Layer w20: v1(2985,4825) v1@3005.47,4825 ; C17.1@5030,4559.53 5030,4590 v1(5065,4625)
  Bottom Layer w25: C13.2@2760,5306.85 2785,5331.85 v1(2785,5355) ; v1@5435,5190 C24.2@5478.15,5190
pads on no net: B1.0 B1.1 B1.6 J3.0 J3.1 JPCBANT.1 JPCBANT.2 JRFID1.5 U2.3 U2.9 U2.10 U2.11 U2.12 U7.5 U7.7 U7.8 U7.9 U7.10 U8.5 U8.6 U10.8 U11_MTR_L.5 U11_MTR_L.6 U11_MTR_R.5 U11_MTR_R.6
copper on no net: | length 629384.2
  Top Layer w20: 3314.91,4300.09 3371.98,4300.09 3387.07,4285 4025,4285 4070,4330 4075,4330
  Top Layer w40: v1(4115,3215) 4180,3280
  Top Layer w50: 2236.47,4179.91 ccw(c7308.62,4260.06) 2871.97,1800.55 ; 2241.21,4179.99 6370.86,4179.99 cw(c1251.38,4260.06) 5723.35,1766.67 ; 2299.53,4115.13 ccw(c7308.62,4260.06) 2921.57,1838.11 ; 2299.53,4120 6306.12,4120 ; 2361.69,4059.46 ccw(c7308.62,4260.06) 2968.1,1878.41 ; 2361.69,4060 6236.12,4060 ; 2427.23,4000.11 6182.83,4000.11 cw(c1251.38,4260.06) 5587.11,1896.12 ; 2427.23,4000.38 ccw(c7308.62,4260.06) 3016.41,1920.77 ; 2492.29,3939.49 ccw(c7308.62,4260.06) 3066.02,1957.84 ; 2492.29,3940.48 6115.85,3939.94 cw(c1251.38,4260.06) 5531.21,1925.83 ; 2560.01,3880 6047.42,3880 ; 2560.01,3880.8 ccw(c7308.62,4260.06) 3116.4,1997.66 ; 2629.33,3820.13 5978.55,3820.13 cw(c1251.38,4260.06) 5428.27,2003.23 ; 2629.33,3820.41 ccw(c7308.62,4260.06) 3169.07,2034.5 ; 2697.28,3759.7 ccw(c7308.62,4260.06) 3217.76,2073.8 ; 2700,3760 5910,3760 ; 2765,3700 5837.81,3700 ; 2766.82,3700.22 ccw(c7308.62,4260.06) 3264.09,2119.23 ; 2780.55,1715.84 ccw(c4267.65,3801.61) 5775.69,1730.92 ; 2782.57,1709.55 cw(c7308.62,4260.06) 2113.57,4300.09 3314.91,4300.09 ; 2820.5,1765.84 cw(c7308.62,4260.06) 2174.04,4239.96 6435,4240.07 ; 2828.31,1755.48 ccw(c4267.65,3801.61) 5722.04,1766.14 ; 2839.85,3639.35 ccw(c7308.62,4260.06) 3317.57,2156.08 ; 2845,3640.07 5765.06,3639.99 cw(c1251.38,4260.06) 5274.85,2122.42 ; 2870.87,1798.98 ccw(c4267.65,3801.61) 5675.72,1806.9 ; 2908.77,3578.84 5688.99,3580.16 cw(c1251.38,4260.06) 5215.96,2153.71 ; 2909.56,3578.96 ccw(c7308.62,4260.06) 3360.99,2202.91 ; 2933.94,1828.43 ccw(c4267.65,3801.61) 5629.88,1848.01 ; 2967.5,1878.08 ccw(c4267.65,3801.61) 5584.03,1889.14 ; 2979.98,3520 5615,3520 ; 2979.98,3520.85 ccw(c7308.62,4260.06) 3408.65,2241.71 ; 3020.12,1915.18 ccw(c4267.65,3801.61) 5531.16,1925.85 ; 3051.95,3460 5540,3460 ; 3051.95,3460.37 ccw(c7308.62,4260.06) 3453.23,2286.54 ; 3065.56,1957.14 ccw(c4267.65,3801.61) 5478.14,1962.64 ; 3120.61,1993.08 ccw(c4267.65,3801.61) 5423.89,1998.94 ; 3123.71,3398.41 5468.88,3400.23 cw(c1251.38,4260.06) 5076.58,2286.61 ; 3123.71,3398.7 ccw(c7308.62,4260.06) 3496.42,2330.66 ; 3168.62,2033.78 ccw(c4267.65,3801.61) 5373.21,2037.85 ; 3197.38,3340 5390,3340 ; 3197.38,3340.53 ccw(c7308.62,4260.06) 3539.86,2377.43 ; 3224.83,2069.71 ccw(c4267.65,3801.61) 5320.71,2075.91 ; 3270.49,2112.36 ccw(c4267.65,3801.61) 5267.27,2113.81 ; 3316.81,2154.77 ccw(c4267.65,3801.61) 5216.13,2153.41 ; 3367.25,2195.1 ccw(c4267.65,3801.61) 5165.68,2193.78 ; 3417.72,2235.8 ccw(c4267.65,3801.61) 5113.47,2233.57 ; 3462.33,2279.95 ccw(c4267.65,3801.61) 5068.81,2277.75 ; 3505.1,2325.2 ccw(c4267.65,3801.61) 5020.99,2320.48 ; 3545.89,2371.85 ccw(c4267.65,3801.61) 4975.01,2364.67 ; 4180,3280 4205,3280 5312.34,3280 ; 4974.23,2365.06 ccw(c1251.38,4260.06) 5312.34,3280.64 ; 5026.46,2326.69 ccw(c1251.38,4260.06) 5391.66,3339.63 ; 5120.99,2241.87 ccw(c1251.38,4260.06) 5541.65,3459.69 ; 5164.05,2194.64 ccw(c1251.38,4260.06) 5613.45,3520.26 ; 5326.66,2081.44 ccw(c1251.38,4260.06) 5837.81,3695.27 ; 5378.27,2043.24 ccw(c1251.38,4260.06) 5908.04,3749.12 ; 5478.44,1962.47 ccw(c1251.38,4260.06) 6047.42,3879.41 ; 5633.24,1853.22 ccw(c1251.38,4260.06) 6246.73,4059.93 ; 5676.06,1806.71 ccw(c1251.38,4260.06) 6308.76,4120.03 ; 5777.37,1736.56 ccw(c1251.38,4260.06) 6433.29,4240.08
  Mid-Layer Top w40: 4050,3280 v1(4115,3215)
  Mid-Layer Top w50: 2113.41,4240.07 6374.38,4239.96 cw(c1239.79,4260.06) 5727.91,1765.84 ; 2115.12,4240.08 ccw(c7297.03,4260.06) 2771.04,1736.56 ; 2239.65,4120.03 ccw(c7297.03,4260.06) 2872.35,1806.71 ; 2242.29,4120 6248.89,4120 ; 2301.68,4059.93 ccw(c7297.03,4260.06) 2915.17,1853.22 ; 2312.29,4060 6186.72,4060 ; 2500.99,3879.41 ccw(c7297.03,4260.06) 3069.97,1962.47 ; 2500.99,3880 5988.4,3880 ; 2638.41,3760 5848.41,3760 ; 2640.37,3749.12 ccw(c7297.03,4260.06) 3170.14,2043.24 ; 2710.6,3695.27 ccw(c7297.03,4260.06) 3221.75,2081.44 ; 2710.6,3700 5783.41,3700 ; 2772.73,1730.92 ccw(c4280.76,3801.61) 5767.86,1715.84 ; 2825.06,1766.67 cw(c7297.03,4260.06) 2177.55,4179.99 6307.2,4179.99 ; 2826.37,1766.14 ccw(c4280.76,3801.61) 5720.11,1755.48 ; 2872.69,1806.9 ccw(c4280.76,3801.61) 5677.54,1798.98 ; 2918.53,1848.01 ccw(c4280.76,3801.61) 5614.47,1828.43 ; 2933.41,3520 5568.43,3520 ; 2934.96,3520.26 ccw(c7297.03,4260.06) 3384.36,2194.64 ; 2961.3,1896.12 cw(c7297.03,4260.06) 2365.58,4000.11 6121.18,4000.11 ; 2964.38,1889.14 ccw(c4280.76,3801.61) 5580.91,1878.08 ; 3006.76,3459.69 ccw(c7297.03,4260.06) 3427.42,2241.87 ; 3008.41,3460 5496.47,3460 ; 3017.21,1925.83 cw(c7297.03,4260.06) 2432.56,3939.94 6056.12,3940.48 ; 3017.25,1925.85 ccw(c4280.76,3801.61) 5528.29,1915.18 ; 3070.27,1962.64 ccw(c4280.76,3801.61) 5482.85,1957.14 ; 3120.14,2003.23 cw(c7297.03,4260.06) 2569.86,3820.13 5919.08,3820.13 ; 3124.52,1998.94 ccw(c4280.76,3801.61) 5427.8,1993.08 ; 3156.75,3339.63 ccw(c7297.03,4260.06) 3521.95,2326.69 ; 3158.41,3340 5351.03,3340 ; 3175.2,2037.85 ccw(c4280.76,3801.61) 5379.79,2033.78 ; 3227.7,2075.91 ccw(c4280.76,3801.61) 5323.58,2069.71 ; 3236.07,3280 3940,3280 4005,3280 4050,3280 ; 3236.07,3280.64 ccw(c7297.03,4260.06) 3574.18,2365.06 ; 3273.56,2122.42 cw(c7297.03,4260.06) 2783.35,3639.99 5703.41,3640.07 ; 3281.14,2113.81 ccw(c4280.76,3801.61) 5277.92,2112.36 ; 3332.28,2153.41 ccw(c4280.76,3801.61) 5231.6,2154.77 ; 3332.45,2153.71 cw(c7297.03,4260.06) 2859.43,3580.16 5639.64,3578.84 ; 3382.73,2193.78 ccw(c4280.76,3801.61) 5181.16,2195.1 ; 3434.94,2233.57 ccw(c4280.76,3801.61) 5130.69,2235.8 ; 3471.83,2286.61 cw(c7297.03,4260.06) 3079.53,3400.23 5424.7,3398.41 ; 3479.6,2277.75 ccw(c4280.76,3801.61) 5086.08,2279.95 ; 3527.42,2320.48 ccw(c4280.76,3801.61) 5043.31,2325.2 ; 3573.4,2364.67 ccw(c4280.76,3801.61) 5002.53,2371.85 ; v1@4295,4350 4345,4300 6423.41,4300 ; 5008.55,2377.43 ccw(c1239.79,4260.06) 5351.03,3340.53 ; 5051.99,2330.66 ccw(c1239.79,4260.06) 5424.7,3398.7 ; 5095.18,2286.54 ccw(c1239.79,4260.06) 5496.47,3460.37 ; 5139.77,2241.71 ccw(c1239.79,4260.06) 5568.43,3520.85 ; 5187.42,2202.91 ccw(c1239.79,4260.06) 5638.86,3578.96 ; 5230.84,2156.08 ccw(c1239.79,4260.06) 5708.56,3639.35 ; 5284.32,2119.23 ccw(c1239.79,4260.06) 5781.59,3700.22 ; 5330.65,2073.8 ccw(c1239.79,4260.06) 5851.13,3759.7 ; 5379.34,2034.5 ccw(c1239.79,4260.06) 5919.08,3820.41 ; 5432.01,1997.66 ccw(c1239.79,4260.06) 5988.4,3880.8 ; 5482.39,1957.84 ccw(c1239.79,4260.06) 6056.12,3939.49 ; 5532.01,1920.77 ccw(c1239.79,4260.06) 6121.18,4000.38 ; 5580.31,1878.41 ccw(c1239.79,4260.06) 6186.72,4059.46 ; 5626.84,1838.11 ccw(c1239.79,4260.06) 6248.88,4115.13 ; 5676.45,1800.55 ccw(c1239.79,4260.06) 6311.94,4179.91 ; 5765.84,1709.55 ccw(c1239.79,4260.06) 6434.85,4300.09
  Mid-Layer Bottom w20: 3275,4290 3315,4290 4025,4290 4213.1,4290 v1@4280,4356.9
  Mid-Layer Bottom w40: v1(4005,3205) 4080,3280
  Mid-Layer Bottom w50: 2236.47,4179.91 ccw(c7308.62,4260.06) 2871.97,1800.55 ; 2241.21,4179.99 6370.86,4179.99 cw(c1251.38,4260.06) 5723.35,1766.67 ; 2299.53,4115.13 ccw(c7308.62,4260.06) 2921.57,1838.11 ; 2299.53,4120 6306.12,4120 ; 2361.69,4059.46 ccw(c7308.62,4260.06) 2968.1,1878.41 ; 2361.69,4060 6236.12,4060 ; 2427.23,4000.11 6182.83,4000.11 cw(c1251.38,4260.06) 5587.11,1896.12 ; 2427.23,4000.38 ccw(c7308.62,4260.06) 3016.41,1920.77 ; 2492.29,3939.49 ccw(c7308.62,4260.06) 3066.02,1957.84 ; 2492.29,3940.48 6115.85,3939.94 cw(c1251.38,4260.06) 5531.21,1925.83 ; 2560.01,3880 6047.42,3880 ; 2560.01,3880.8 ccw(c7308.62,4260.06) 3116.4,1997.66 ; 2629.33,3820.13 5978.55,3820.13 cw(c1251.38,4260.06) 5428.27,2003.23 ; 2629.33,3820.41 ccw(c7308.62,4260.06) 3169.07,2034.5 ; 2697.28,3759.7 ccw(c7308.62,4260.06) 3217.76,2073.8 ; 2700,3760 5910,3760 ; 2765,3700 5837.81,3700 ; 2766.82,3700.22 ccw(c7308.62,4260.06) 3264.09,2119.23 ; 2780.55,1715.84 ccw(c4267.65,3801.61) 5775.69,1730.92 ; 2782.57,1709.55 cw(c7308.62,4260.06) 2113.57,4300.09 3269.91,4300.09 ; 2820.5,1765.84 cw(c7308.62,4260.06) 2174.04,4239.96 6435,4240.07 ; 2828.31,1755.48 ccw(c4267.65,3801.61) 5722.04,1766.14 ; 2839.85,3639.35 ccw(c7308.62,4260.06) 3317.57,2156.08 ; 2845,3640.07 5765.06,3639.99 cw(c1251.38,4260.06) 5274.85,2122.42 ; 2870.87,1798.98 ccw(c4267.65,3801.61) 5675.72,1806.9 ; 2908.77,3578.84 5688.99,3580.16 cw(c1251.38,4260.06) 5215.96,2153.71 ; 2909.56,3578.96 ccw(c7308.62,4260.06) 3360.99,2202.91 ; 2933.94,1828.43 ccw(c4267.65,3801.61) 5629.88,1848.01 ; 2967.5,1878.08 ccw(c4267.65,3801.61) 5584.03,1889.14 ; 2979.98,3520 5615,3520 ; 2979.98,3520.85 ccw(c7308.62,4260.06) 3408.65,2241.71 ; 3020.12,1915.18 ccw(c4267.65,3801.61) 5531.16,1925.85 ; 3051.95,3460 5540,3460 ; 3051.95,3460.37 ccw(c7308.62,4260.06) 3453.23,2286.54 ; 3065.56,1957.14 ccw(c4267.65,3801.61) 5478.14,1962.64 ; 3120.61,1993.08 ccw(c4267.65,3801.61) 5423.89,1998.94 ; 3123.71,3398.41 5468.88,3400.23 cw(c1251.38,4260.06) 5076.58,2286.61 ; 3123.71,3398.7 ccw(c7308.62,4260.06) 3496.42,2330.66 ; 3168.62,2033.78 ccw(c4267.65,3801.61) 5373.21,2037.85 ; 3197.38,3340 5390,3340 ; 3197.38,3340.53 ccw(c7308.62,4260.06) 3539.86,2377.43 ; 3224.83,2069.71 ccw(c4267.65,3801.61) 5320.71,2075.91 ; 3270.49,2112.36 ccw(c4267.65,3801.61) 5267.27,2113.81 ; 3316.81,2154.77 ccw(c4267.65,3801.61) 5216.13,2153.41 ; 3367.25,2195.1 ccw(c4267.65,3801.61) 5165.68,2193.78 ; 3417.72,2235.8 ccw(c4267.65,3801.61) 5113.47,2233.57 ; 3462.33,2279.95 ccw(c4267.65,3801.61) 5068.81,2277.75 ; 3505.1,2325.2 ccw(c4267.65,3801.61) 5020.99,2320.48 ; 3545.89,2371.85 ccw(c4267.65,3801.61) 4975.01,2364.67 ; 4080,3280 5312.34,3280 ; 4974.23,2365.06 ccw(c1251.38,4260.06) 5312.34,3280.64 ; 5026.46,2326.69 ccw(c1251.38,4260.06) 5391.66,3339.63 ; 5120.99,2241.87 ccw(c1251.38,4260.06) 5541.65,3459.69 ; 5164.05,2194.64 ccw(c1251.38,4260.06) 5613.45,3520.26 ; 5326.66,2081.44 ccw(c1251.38,4260.06) 5837.81,3695.27 ; 5378.27,2043.24 ccw(c1251.38,4260.06) 5908.04,3749.12 ; 5478.44,1962.47 ccw(c1251.38,4260.06) 6047.42,3879.41 ; 5633.24,1853.22 ccw(c1251.38,4260.06) 6246.73,4059.93 ; 5676.06,1806.71 ccw(c1251.38,4260.06) 6308.76,4120.03 ; 5777.37,1736.56 ccw(c1251.38,4260.06) 6433.29,4240.08
  Bottom Layer w40: 3930,3280 v1(4005,3205) ; 4180,4340 4222.93,4297.07
  Bottom Layer w50: 2113.41,4240.07 6374.38,4239.96 cw(c1239.79,4260.06) 5727.91,1765.84 ; 2115.12,4240.08 ccw(c7297.03,4260.06) 2771.04,1736.56 ; 2239.65,4120.03 ccw(c7297.03,4260.06) 2872.35,1806.71 ; 2242.29,4120 6248.89,4120 ; 2301.68,4059.93 ccw(c7297.03,4260.06) 2915.17,1853.22 ; 2312.29,4060 6186.72,4060 ; 2500.99,3879.41 ccw(c7297.03,4260.06) 3069.97,1962.47 ; 2500.99,3880 5988.4,3880 ; 2638.41,3760 5848.41,3760 ; 2640.37,3749.12 ccw(c7297.03,4260.06) 3170.14,2043.24 ; 2710.6,3695.27 ccw(c7297.03,4260.06) 3221.75,2081.44 ; 2710.6,3700 5783.41,3700 ; 2772.73,1730.92 ccw(c4280.76,3801.61) 5767.86,1715.84 ; 2825.06,1766.67 cw(c7297.03,4260.06) 2177.55,4179.99 6307.2,4179.99 ; 2826.37,1766.14 ccw(c4280.76,3801.61) 5720.11,1755.48 ; 2872.69,1806.9 ccw(c4280.76,3801.61) 5677.54,1798.98 ; 2918.53,1848.01 ccw(c4280.76,3801.61) 5614.47,1828.43 ; 2933.41,3520 5568.43,3520 ; 2934.96,3520.26 ccw(c7297.03,4260.06) 3384.36,2194.64 ; 2961.3,1896.12 cw(c7297.03,4260.06) 2365.58,4000.11 6121.18,4000.11 ; 2964.38,1889.14 ccw(c4280.76,3801.61) 5580.91,1878.08 ; 3006.76,3459.69 ccw(c7297.03,4260.06) 3427.42,2241.87 ; 3008.41,3460 5496.47,3460 ; 3017.21,1925.83 cw(c7297.03,4260.06) 2432.56,3939.94 6056.12,3940.48 ; 3017.25,1925.85 ccw(c4280.76,3801.61) 5528.29,1915.18 ; 3070.27,1962.64 ccw(c4280.76,3801.61) 5482.85,1957.14 ; 3120.14,2003.23 cw(c7297.03,4260.06) 2569.86,3820.13 5919.08,3820.13 ; 3124.52,1998.94 ccw(c4280.76,3801.61) 5427.8,1993.08 ; 3156.75,3339.63 ccw(c7297.03,4260.06) 3521.95,2326.69 ; 3158.41,3340 5351.03,3340 ; 3175.2,2037.85 ccw(c4280.76,3801.61) 5379.79,2033.78 ; 3227.7,2075.91 ccw(c4280.76,3801.61) 5323.58,2069.71 ; 3236.07,3280 3940,3280 3930,3280 ; 3236.07,3280.64 ccw(c7297.03,4260.06) 3574.18,2365.06 ; 3273.56,2122.42 cw(c7297.03,4260.06) 2783.35,3639.99 5703.41,3640.07 ; 3281.14,2113.81 ccw(c4280.76,3801.61) 5277.92,2112.36 ; 3332.28,2153.41 ccw(c4280.76,3801.61) 5231.6,2154.77 ; 3332.45,2153.71 cw(c7297.03,4260.06) 2859.43,3580.16 5639.64,3578.84 ; 3382.73,2193.78 ccw(c4280.76,3801.61) 5181.16,2195.1 ; 3434.94,2233.57 ccw(c4280.76,3801.61) 5130.69,2235.8 ; 3471.83,2286.61 cw(c7297.03,4260.06) 3079.53,3400.23 5424.7,3398.41 ; 3479.6,2277.75 ccw(c4280.76,3801.61) 5086.08,2279.95 ; 3527.42,2320.48 ccw(c4280.76,3801.61) 5043.31,2325.2 ; 3573.4,2364.67 ccw(c4280.76,3801.61) 5002.53,2371.85 ; 4235,4300 4320,4300 6423.41,4300 ; 5008.55,2377.43 ccw(c1239.79,4260.06) 5351.03,3340.53 ; 5051.99,2330.66 ccw(c1239.79,4260.06) 5424.7,3398.7 ; 5095.18,2286.54 ccw(c1239.79,4260.06) 5496.47,3460.37 ; 5139.77,2241.71 ccw(c1239.79,4260.06) 5568.43,3520.85 ; 5187.42,2202.91 ccw(c1239.79,4260.06) 5638.86,3578.96 ; 5230.84,2156.08 ccw(c1239.79,4260.06) 5708.56,3639.35 ; 5284.32,2119.23 ccw(c1239.79,4260.06) 5781.59,3700.22 ; 5330.65,2073.8 ccw(c1239.79,4260.06) 5851.13,3759.7 ; 5379.34,2034.5 ccw(c1239.79,4260.06) 5919.08,3820.41 ; 5432.01,1997.66 ccw(c1239.79,4260.06) 5988.4,3880.8 ; 5482.39,1957.84 ccw(c1239.79,4260.06) 6056.12,3939.49 ; 5532.01,1920.77 ccw(c1239.79,4260.06) 6121.18,4000.38 ; 5580.31,1878.41 ccw(c1239.79,4260.06) 6186.72,4059.46 ; 5626.84,1838.11 ccw(c1239.79,4260.06) 6248.88,4115.13 ; 5676.45,1800.55 ccw(c1239.79,4260.06) 6311.94,4179.91 ; 5765.84,1709.55 ccw(c1239.79,4260.06) 6434.85,4300.09
  other v1: 4280,4365

## Polygon pours and split planes (outlines as drawn)
GND on Mid-Layer Bottom "Bottom Layer-No Net" (solid, pour order 1000): 3033.02,5075 3033.02,5335.2 2978.54,5335.2 2973.58,5340.99 2963.68,5352.55 2963.68,5497.11 2963.68,5595.41 2929.01,5635.88 2904.25,5664.8 2825,5664.8 2825,5901.87 2829.95,5907.65 2844.81,5925 3176.65,5925 3196.46,5925 3325.24,5774.66 3350,5745.75 3350,5075
GND on Mid-Layer Bottom "Bottom Layer-No Net" (solid, pour order 1000): 3360,5215 3360,5045 3375,5030 3380,5025 3445,5025 3445,4865 3460,4850 3520,4790 3955,4790 3960,4790 4025,4855 4015,4865 4015,5210 4005,5210 3925,5290 3920,5285 3570,5285 3555,5285 3485,5215
GND on Mid-Layer Bottom "Bottom Layer-No Net" (solid, pour order 1001): 2650,4985 2955,4985 2965,4995 2965,5180 2965,5240 2920,5285 2915,5290 2915,5390 2915,5400 2835,5480 2695,5480 2695,5465 2655,5425 2655,5210 2655,5200 2635,5180 2635,4995
GND on Mid-Layer Bottom "Bottom Layer-No Net" (solid, pour order 1002): 2640,4410 3270,4410 3275,4415 3270,4420 3270,4450 3270,4555 3205,4620 3205,4625 3205,4915 3185,4935 2640,4935
GND on Mid-Layer Bottom "Bottom Layer-No Net" (solid, pour order 1003): 5295,4405 5875,4405 5925,4455 5915,4465 5915,4950 5355,4950 5300,4895
GND on Mid-Layer Bottom "Bottom Layer-No Net" (solid, pour order 1004): 5785,4965 5600,4965 5600,4980 5550,5030 5535,5045 5325,5045 5325,5340 5395,5410 5870,5410 5870,5020 5875,5015
GND on Mid-Layer Top "Bottom Layer-No Net" (solid, pour order 1000): 3715,4400 3725,4390 4010,4390 4010,4625 4005,4630 3970,4630 3970,4635 3930,4675 3910,4695 3910,4745 3670,4745 3665,4740 3665,4640 3665,4600 3710,4555
GND on Mid-Layer Top "Bottom Layer-No Net" (solid, pour order 1001): 4040,4850 4040,4385 5265,4385 5285,4405 5285,4790 5285,4800 5270,4815 5265,4810 5100,4810 5085,4810 5000,4725 4970,4695 4860,4695 4825,4695 4785,4655 4780,4650 4550,4650 4480,4720 4455,4745 4330,4745 4295,4745 4190,4850
GND on Bottom Layer "Bottom Layer-No Net" (solid, pour order 1000): 3664.37,5869.37 3671.19,5875.51 4135,5875.51 4135,6261.82 4113.56,6281.12 4081.5,6310 3664.63,6310

## Keep-outs
Keep-Out Layer:
  lines w2: 2075,4245 2075,4405 2509.07,4405 2509.05,6244.45 2509.13,6246.66 2509.36,6248.85 2509.74,6251.03 2510.28,6253.17 2510.96,6255.27 2511.79,6257.32 2512.76,6259.3 2513.86,6261.21 2515.1,6263.04 2516.45,6264.78 2517.93,6266.42 2519.52,6267.96 2521.21,6269.38 2523,6270.68 2524.87,6271.85 2526.82,6272.88 2528.84,6273.78 2532.7,6275.06 2532.65,6275.26 2790.21,6332.22 3051.13,6371.07 3315.24,6391.67 3315.24,6392.05 5280.22,6392.05 ; 2075.34,4309.81 ccw(c7308.62,4249.35) 2755.11,1669.35 ; 2755.15,1680.22 ccw(c4267.65,3801.61) 5823.6,1711.88 ; 5245.12,6332.09 5245.22,6332.05 ; 5821.48,1722.1 ccw(c1250.36,4270.77) 6483.98,4260.73 ; 6052.35,6244.45 6052.36,4405 6485,4405 6485,4245

## Silkscreen, mask and mechanical layers (free items; w line width, h text height)
Top Overlay:
  lines w10: 5220,4990 5220,6090 ; 5225,4995 5920,4995 5920,6095
Bottom Overlay:
  lines w10: 3435,4505 5205,4505 5205,5305 ; 3435,4510 3435,5310 5205,5310

## Text inside footprints (layer, text, board x,y; h text height)
J1: Top Overlay "1" at 3300,4420 h50; Top Overlay "2" at 3280,4520 h50; Top Overlay "5" at 3640,4420 h50; Top Overlay "6" at 3640,4520 h50